# EAGLE board MINI_SAM_D51_004 (EAGLE 9.1.1)
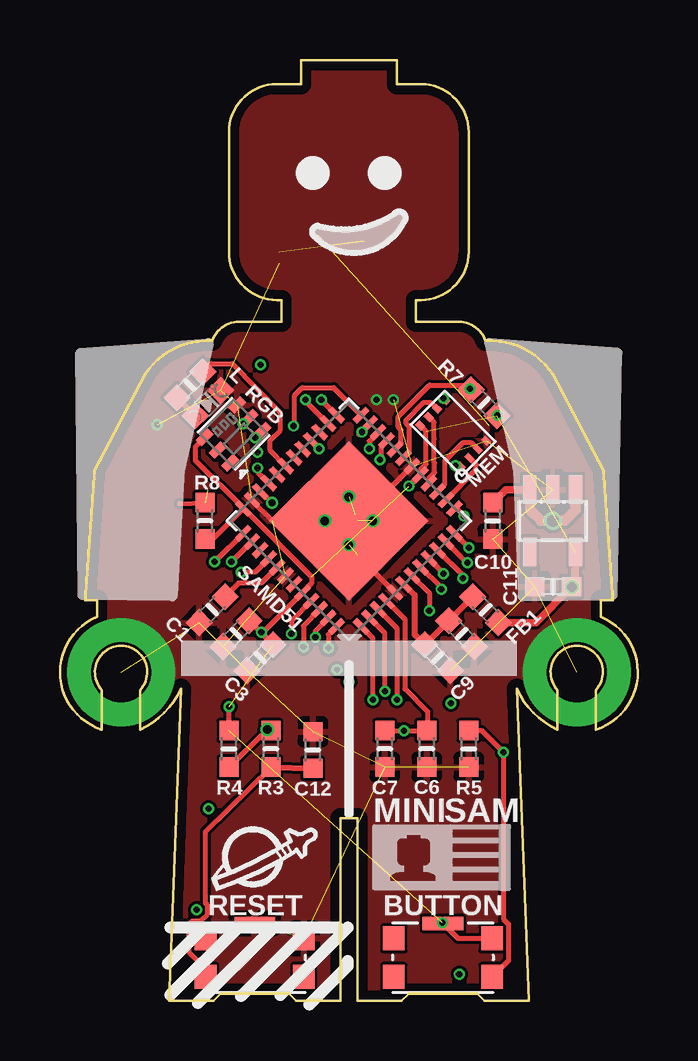
[diagram p0: board, top side]
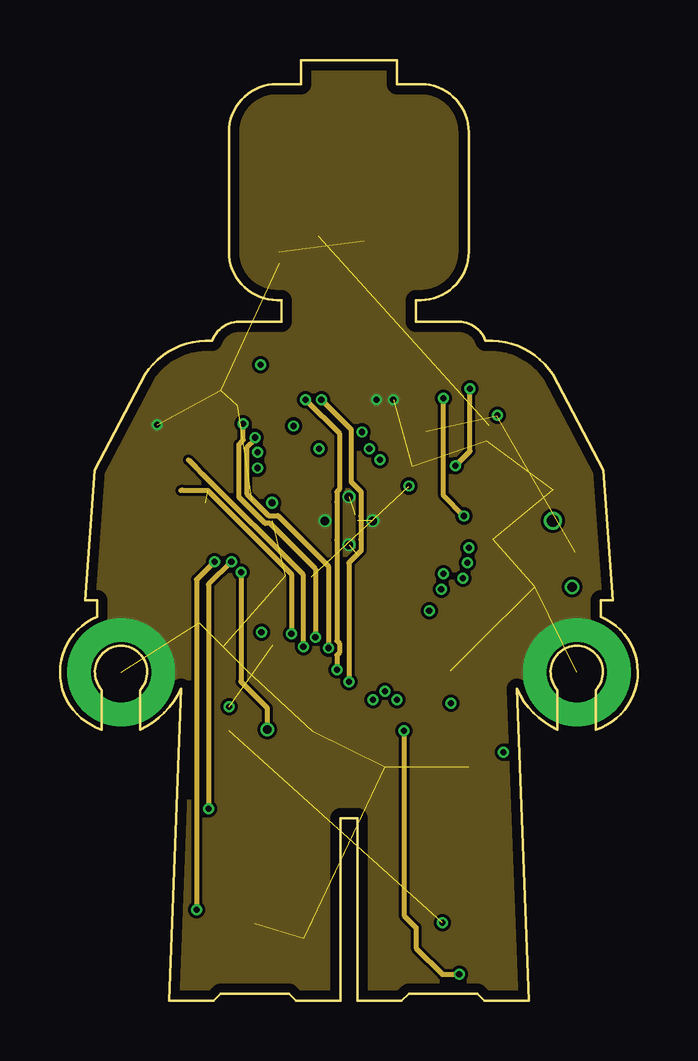
[diagram p1: board, inner layer Route2]
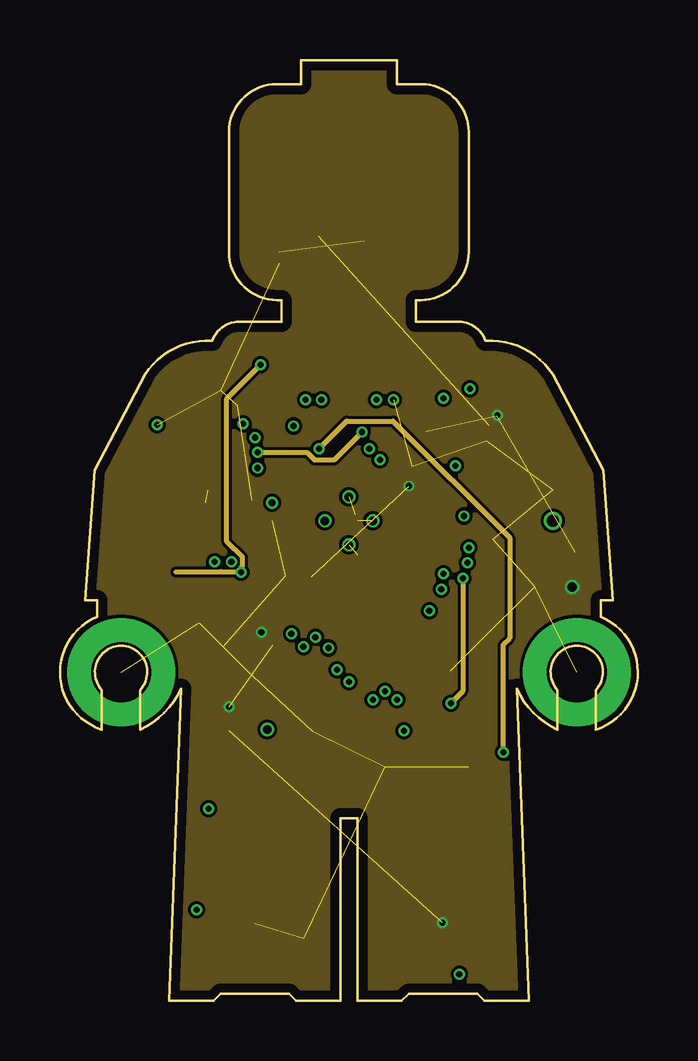
[diagram p2: board, inner layer Route15]
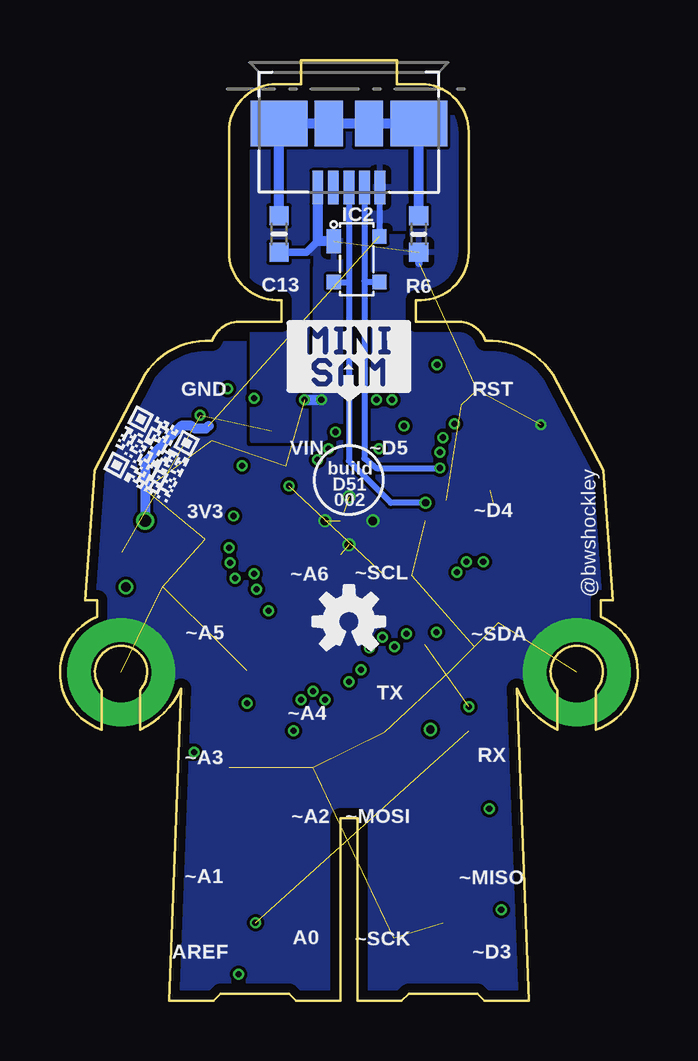
[diagram p3: board, bottom side, seen from below]

Size 24.1 x 39.2 mm. Coordinates in mm from the lower left corner, seen from the top.
Outline: 10.05,39.2 14.05,39.2 14.05,38.2 15.05,38.2 arc-90 17.05,36.2 17.05,31.2 arc-90 15.05,29.2 14.85,29.2 14.85,28.3 16.73,28.3 arc-63 17.75,27.5 arc-60 20.55,26.1 22.65,22.1 23.05,16.7 22.55,16.7 22.55,16 arc-140 22.35,11.3 22.35,12.95 arc132 21.55,14.8 arc132 20.75,12.95 20.75,11.3 arc-40 19.05,13 19.55,0 17.7,0 17.4,0.3 14.55,0.3 14.25,0 12.4,0 12.4,7.6 11.7,7.6 11.7,0 9.85,0 9.55,0.3 6.7,0.3 6.4,0 4.55,0 5.05,13 arc-40 3.35,11.3 3.35,12.95 arc132 2.55,14.8 arc132 1.75,12.95 1.75,11.3 arc-140 1.55,16 1.55,16.7 1.05,16.7 1.45,22.1 3.55,26.1 arc-60 6.35,27.5 arc-63 7.37,28.3 9.25,28.3 9.25,29.2 9.05,29.2 arc-90 7.05,31.2 7.05,36.2 arc-90 9.05,38.2 10.05,38.2 10.05,39.2
Copper layers (1*2*15*16): Top 0.035559375mm / dielectric 0.17018125mm / Route2 0.01778125mm / dielectric 47mil / Route15 0.01778125mm / dielectric 0.17018125mm / Bottom 0.035559375mm
Design rules "oshpark-4layer *": minimum track width 5mil, minimum drill 10mil, track to track 5mil, track to pad 5mil, pad to pad 5mil, via to via 5mil, smd to smd 5mil, copper to edge 15mil, drill to drill 6mil, minimum pad ring 4mil, minimum via ring 4mil, stop-mask expansion 2.5mil, vias tented up to drill 0.5mm, thermal gap 10mil

## Footprints (pad centres in the part's own frame; a part is rotated, then mirrored left to right if it is on the bottom)
_0603MP = smd 0.8 x 0.8: 1 -0.762,0; 2 0.762,0
SOT23-5 = smd 0.55 x 1.2: 1 -0.95,-1.3; 2 0,-1.3; 3 0.95,-1.3; 4 0.95,1.3; 5 -0.95,1.3
SOT143B_REFLOW = smd 1 x 0.6: P1 -0.75,-0.95 | smd 0.6 x 0.6: P2 0.95,-0.95; P$3 0.95,0.95; P$4 -0.95,0.95
TQFN48_7MM = smd 0.25 x 0.75: 1 -2.75,-3.475; 2 -2.25,-3.475; 3 -1.75,-3.475; 4 -1.25,-3.475; 5 -0.75,-3.475; 6 -0.25,-3.475; 7 0.25,-3.475; 8 0.75,-3.475; 9 1.25,-3.475; 10 1.75,-3.475; 11 2.25,-3.475; 12 2.75,-3.475; 25 2.75,3.475; 26 2.25,3.475; 27 1.75,3.475; 28 1.25,3.475; 29 0.75,3.475; 30 0.25,3.475; 31 -0.25,3.475; 32 -0.75,3.475; 33 -1.25,3.475; 34 -1.75,3.475; 35 -2.25,3.475; 36 -2.75,3.475 | smd 0.75 x 0.25: 13 3.475,-2.75; 14 3.475,-2.25; 15 3.475,-1.75; 16 3.475,-1.25; 17 3.475,-0.75; 18 3.475,-0.25; 19 3.475,0.25; 20 3.475,0.75; 21 3.475,1.25; 22 3.475,1.75; 23 3.475,2.25; 24 3.475,2.75; 37 -3.475,2.75; 38 -3.475,2.25; 39 -3.475,1.75; 40 -3.475,1.25; 41 -3.475,0.75; 42 -3.475,0.25; 43 -3.475,-0.25; 44 -3.475,-0.75; 45 -3.475,-1.25; 46 -3.475,-1.75; 47 -3.475,-2.25; 48 -3.475,-2.75 | smd 4.7 x 4.7: THERMAL 0,0
MOLEX_47346-1001 = smd 0.45 x 1.38: P1 1.3,-2.66; P2 0.65,-2.66; P3 0,-2.66; P4 -0.65,-2.66; P5 -1.3,-2.66 | smd 2.375 x 1.9: PAD1 -2.913,0; PAD4 2.913,0 | smd 1.175 x 1.9: PAD2 -0.838,0; PAD3 0.838,0
CHIPLED_0603_NOOUTLINE = smd 0.8 x 0.8: A 0,-0.75; C 0,0.75
APA102_2020 = smd 0.7 x 0.35: 1 -0.95,-0.75; 2 -0.95,0; 3 -0.95,0.75; 4 0.95,0.75; 5 0.95,0; 6 0.95,-0.75
KMS_SWITCH = smd 0.9 x 1: 1 -2.05,-0.8; 2 -2.05,0.8; 4 2.05,0.8; 5 2.05,-0.8 | smd 1.7 x 0.55: 3 0,1.425
USON8 = smd 0.35 x 0.25: 1 -1.2,0.75; 2 -1.2,0.25; 3 -1.2,-0.25; 4 -1.2,-0.75; 5 1.2,-0.75; 6 1.2,-0.25; 7 1.2,0.25; 8 1.2,0.75

## Placement (x,y rotation side)
C1  0.1µF  [_0603MP]  6.35,16.3 225 top
C2  10µF  [_0603MP]  7.35,15.3 225 top
C3  0.1µF  [_0603MP]  8.35,14.3 225 top
C6  4.7µF  [_0603MP]  15.3,10.5 270 top
C7  0.1µF  [_0603MP]  13.55,10.5 270 top
C8  0.1µF  [_0603MP]  16.75,15.3 315 top
C9  10µF  [_0603MP]  15.75,14.3 315 top
C10  10µF  [_0603MP]  18.05,20 90 top
C11  10µF  [_0603MP]  20.57,17.25 180 top
C12  0.1µF  [_0603MP]  10.55,10.45 270 top
C13  4.7nF  [_0603MP]  14.96,31.95 270 bottom
FB1  [_0603MP]  17.75,16.3 135 top
IC1  AP2112K-3.3V  [SOT23-5]  20.55,20 180 top
IC2  PRTR5V0U2X  [SOT143B_REFLOW]  11.72,30.9 270 bottom
IC4  ATSAMD51G_TQFN48  [TQFN48_7MM]  12.05,20 45 top
J1  MOLEX_47346-100147346  [MOLEX_47346-1001]  12.05,36.55 0 bottom
L  [CHIPLED_0603_NOOUTLINE]  6.17,24.9 315 top
R2  1k  [_0603MP]  5.42,25.66 45 top
R3  330Ohm  [_0603MP]  8.8,10.5 270 top
R4  10K  [_0603MP]  7.05,10.5 90 top
R5  10K  [_0603MP]  17.05,10.5 90 top
R6  1M  [_0603MP]  9.14,31.95 90 bottom
R7  100k  [_0603MP]  17.68,24.91 135 top
R8  1k  [_0603MP]  6.05,20 270 top
RGB  AP102-2020  [APA102_2020]  7.24,23.62 45 top
SW1  KMS233GLFG  [KMS_SWITCH]  8.12,1.8 0 top
SW2  KMS233GLFG  [KMS_SWITCH]  15.97,1.8 0 top
U1  GD25x16  [USON8]  16.4,23.65 135 top
U$1  [MINISAMQR_3MM]  22.3,22.15 332.3 bottom
U$3  [OSHW-LOGO-S]  12.05,15.8 0 bottom

## Library data of the parts
C1-C3 C6-C13 FB1 IC4 L R2-R8 RGB U1 = microbuilder
IC1 = SparkFun-PowerIC; PROD_ID: VREG-12457
IC2 J1 SW1 SW2 U$1 = Shockley_Custom
U$3 = SparkFun-Aesthetics

## Nets
!RESET: IC4.40 R3.1 R4.1
A0: IC4.3
A1: IC4.10
A2: IC4.7
A3: IC4.8
A4: IC4.9
A5: IC4.11
A6_D2: IC4.12
AREF: C6.1 C7.1 IC4.4
D3: IC4.37
D4: IC4.23
D5: IC4.24
D9: IC4.28 R5.2 SW2.5
D10: IC4.29
D11: IC4.30
D12: IC4.32
D13: IC4.31 R2.2
DOTSTAR_CLK: IC4.47 RGB.5
DOTSTAR_DATA: IC4.48 RGB.6
GND: C1.2 C2.2 C3.2 C6.2 C7.2 C8.2 C9.2 C10.1 C11.2 C12.1 C13.2 IC1.2 IC2.P1 IC4.5 IC4.18 IC4.35 IC4.42 IC4.THERMAL J1.P5 L.C R5.1 R6.1 RGB.4 SW1.3 SW1.4 U1.4
MISO: IC4.38
MOSI: IC4.1
N$2: C13.1 J1.PAD1 J1.PAD2 J1.PAD3 J1.PAD4 R6.2
N$3: L.A R2.1
N$4: C12.2 R3.2 SW1.1
N$9: C1.1 IC4.41
QSPI_CS: IC4.20 R7.2 U1.1
QSPI_DATA[0]: IC4.13 U1.5
QSPI_DATA[1]: IC4.14 U1.2
QSPI_DATA[2]: IC4.15 U1.3
QSPI_DATA[3]: IC4.16 U1.7
QSPI_SCK: IC4.19 U1.6
RX_D0: IC4.25
SCK: IC4.2
SCL: IC4.22
SDA: IC4.21
SWCLK: IC4.45 R8.1
SWDIO: IC4.46
TX_D1: IC4.26
USBD+ [USB_DATA]: IC2.P2 IC4.34 J1.P3
USBD- [USB_DATA]: IC2.P$3 IC4.33 J1.P2
VDD: C2.1 C3.1 C11.1 FB1.1 IC1.5 IC4.17 IC4.36 IC4.44 R4.2 R7.1 R8.2 RGB.3 SW2.3 SW2.4 U1.8
VDDANA: C8.1 C9.1 FB1.2 IC4.6
VIN: C10.2 IC1.1 IC1.3 IC2.P$4 J1.P1
VSW: IC4.43

## Tracks (layer width: path | path; a pad name or v marks a point on that pad's centre or on a via)
!RESET  (via drill 0.25, 0.35)
  Top 0.203: v8.65,11.3 R3.1 8.6,11.26 R4.1 | IC4.40 8.14,17.86 v7.55,17.86
  Route2 0.203: v7.55,17.86 7.55,13.3 8.65,12.2 v8.65,11.3
  Route15 0.203: v8.37,26.5 6.96,25.09 6.96,19.14 7.6,18.49 7.6,18.11 7.55,18.05 v7.55,17.86 6.7,17.86 | 6.7,17.86 4.83,17.86 | 6.72,17.88 6.7,17.86
A0  (via drill 0.25)
  Top 0.203: IC4.3 14.05,15.53 v14.05,12.55
A1  (via drill 0.25)
  Top 0.203: v16.8,17.6 16.8,17.73 IC4.10
  Route15 0.203: v16.8,17.6 16.8,12.9 v16.3,12.4
A2  (via drill 0.25)
  Top 0.203: IC4.7 15.4,17 v15.4,16.25
A3  (via drill 0.25)
  Top 0.203: v15.9,17.15 15.9,17.21 IC4.8
A4  (via drill 0.25)
  Top 0.203: v16,17.8 16,17.82 IC4.9
A5  (via drill 0.25)
  Top 0.203: IC4.11 16.68,18.55 v17,18.25
A6_D2  (via drill 0.25)
  Top 0.203: v17.05,18.88 IC4.12
AREF  (via drill 0.25)
  Top 0.203: C7.1 14.35,11.26 | 14.35,11.26 C6.1 15.33,12.05 14.38,13 14.38,15.9 IC4.4 | v14.35,11.25 14.35,11.26
  Route2 0.203: v14.35,11.25 14.35,3.55 14.85,3.05 14.85,2.2 15.95,1.1 v16.65,1.1
D3  (via drill 0.25)
  Top 0.203: IC4.37 v6.45,18.3
  Route2 0.203: v6.45,18.3 5.7,17.55 v5.7,3.8
D4  (via drill 0.25)
  Top 0.203: IC4.23 12.47,23.6 v12.6,23.7
  Route15 0.203: v8.25,22.85 10.3,22.85 10.61,22.54 11.44,22.54 v12.6,23.7
D5  (via drill 0.25)
  Top 0.203: IC4.24 11.41,25.55 10.1,25.55 9.79,25.24 9.79,23.99 v9.75,23.95
D9  (via drill 0.25)
  Top 0.203: SW2.5 18.7,1.68 18.7,3.19 18.5,3.4 v18.5,10.35 17.59,11.26 R5.2 | IC4.28 10.5,23.32 v10.8,23
  Top 0.254: 18.02,1.29 SW2.5
  Route15 0.203: v18.5,10.35 18.5,14.85 18.75,15.11 18.75,19.29 13.89,24.16 11.95,24.16 v10.8,23
D13
  Top 0.203: IC4.31 8.76,22.93 8.76,23.35 9.19,23.78 9.19,24.51 7.2,26.55 6.3,26.55 R2.2
DOTSTAR_CLK  (via drill 0.25)
  Top 0.203: IC4.47 10.65,15.42 v10.65,15.15 | v7.64,24.05 7.91,24.32 RGB.5
  Route2 0.203: v10.65,15.15 10.65,18 8.76,19.89 8.56,19.89 7.46,20.99 7.46,23.18 7.64,23.36 v7.64,24.05
DOTSTAR_DATA  (via drill 0.25)
  Top 0.203: IC4.48 11.2,15.26 v11.2,14.7 | v8.13,23.47 8.47,23.76 RGB.6
  Route2 0.203: v11.2,14.7 11.2,18.11 9.09,20.22 8.7,20.22 7.79,21.13 7.79,23.04 8.13,23.38 v8.13,23.47
GND  (via drill 0.25, 0.35, 2.5 pad 4.5)  (27 unrouted)
  Top 0.203: 12.3,20.25 IC4.THERMAL | 11.69,20 IC4.THERMAL | IC4.5 12.4,18.59 12.4,20 | IC4.35 8.87,20 IC4.THERMAL | IC4.18 12.4,20 | 12.4,20 IC4.THERMAL | IC4.THERMAL v11.05,20
  Bottom 0.305: 9.14,30.73 R6.1 | C13.2 13.81,31.18 13.35,31.65
  Bottom 0.406: J1.P5 13.35,31.65 IC2.P1 | v13.9,25.05 v13.2,25.05
  other vias: 2.55,13.7 21.55,13.7 13.05,20 4.05,24 12.05,19 12.05,21
  pour Top: 4.55,0 19.55,0 19.55,12 21.05,12 21.05,14 22.05,14 22.05,12 24.05,12 24.05,40 0.05,40 0.05,12 2.05,12 2.05,14 3.05,14 3.05,12 4.55,12
  pour Route2: 4.55,0 19.55,0 19.55,12 21.05,12 21.05,14 22.05,14 22.05,12 24.05,12 24.05,40 0.05,40 0.05,12 2.05,12 2.05,14 3.05,14 3.05,12 4.55,12
  pour Bottom (rank 2): 9.75,40 9.75,32 13.55,32 13.55,27.35 24.05,27.35 24.05,12 19.55,12 19.55,0 4.55,0 4.55,12 3.05,12 3.05,14 2.05,14 2.05,12 0.05,12 0.05,40
MISO  (via drill 0.25)
  Top 0.203: IC4.38 v7.15,18.3
  Route2 0.203: v7.15,18.3 6.2,17.35 v6.2,8
MOSI  (via drill 0.25)
  Top 0.203: v13.05,12.55 13.05,15.11 IC4.1
N$2
  Bottom 0.406: R6.2 J1.PAD4 J1.PAD3 J1.PAD2 J1.PAD1 C13.1
N$3
  Top 0.203: R2.1 5.63,24.37 L.A
N$4
  Top 0.203: 6.07,1.29 SW1.1 6.07,1.33 5.39,2 5.39,3.19 5.53,3.33 5.87,3.33 6.15,3.61 6.15,3.99 6.07,4.07 6.07,7.06 R3.2
  Top 0.254: 6.07,1.07 SW1.1 | R3.2 C12.2
N$9
  Top 0.203: IC4.41 8.39,17.4 7.45,17.4 C1.1
QSPI_CS  (via drill 0.25)
  Top 0.203: IC4.20 14.23,23.24 14.23,23.79 14.1,23.92 14.1,24.34 15.41,25.65 16.95,25.65 R7.2 | U1.1 16.53,22.27 v16.5,22.3 | R7.2 | R7.2 v17.1,25.5
  Route2 0.203: v16.5,22.3 17.1,22.9 v17.1,25.5
QSPI_DATA[0]  (via drill 0.25)
  Top 0.203: IC4.13 16.53,20.51 v16.85,20.2 | U1.5 16.08,25.02 v16,25.1
  Route2 0.203: v16.85,20.2 15.99,21.06 v15.99,25.09 v16,25.1
QSPI_DATA[1]
  Top 0.203: U1.2 17.35,22.35 17.35,22.12 IC4.14
QSPI_DATA[2]
  Top 0.203: 15.97,21.45 IC4.15 16.04,21.52 16.04,22 16.04,22.49 16.8,23.25 17.15,23.25 U1.3
QSPI_DATA[3]
  Top 0.203: IC4.16 15.39,21.78 15.62,22.01 15.62,22.4 15.59,22.43 15.59,23 15.59,23.4 15.59,24.1 U1.7
QSPI_SCK
  Top 0.203: IC4.19 14.56,22.86 14.56,23.93 14.43,24.06 14.43,24.2 15.14,24.91 15.49,24.91 U1.6
RX_D0  (via drill 0.25)
  Top 0.203: IC4.25 v10.89,25.05 v10.9,25.05
  Route2 0.203: v10.89,25.05 v10.9,25.05 12.14,23.81 12.14,21.62 12.55,21.21 12.55,20.22 12.54,20.21 12.54,19.22 12.55,19.21 12.55,18.75 12.05,18.25 v12.05,13.3
SCK  (via drill 0.25)
  Top 0.203: v13.55,12.9 13.55,15.32 IC4.2
SCL  (via drill 0.25)
  Top 0.203: IC4.22 12.9,23.32 v12.9,23
SDA  (via drill 0.25)
  Top 0.203: v13.35,22.55 13.45,22.66 13.39,22.72 13.39,23.11 IC4.21
SWCLK  (via drill 0.25)  (1 unrouted)
  Top 0.203: IC4.45 9.65,15.83 v9.65,15.3 | 4.98,20.72 R8.1
  Route2 0.203: 5.05,21.27 5.14,21.27 6.16,21.27 9.65,17.78 v9.65,15.3
SWDIO  (via drill 0.25)
  Top 0.203: IC4.46 10.15,15.62 v10.15,14.75
  Route2 0.203: v10.15,14.75 10.15,17.75 5.97,21.93 5.65,22.25 5.36,22.54
TX_D1  (via drill 0.25)
  Top 0.203: v10.25,25.05 10.25,24.98 IC4.26
  Route2 0.203: v11.55,13.8 11.55,14.4 11.65,14.51 11.65,14.89 11.54,15 11.54,19.21 11.55,19.22 11.55,20.78 11.54,20.79 11.54,21.21 11.65,21.32 11.65,23.64 v10.25,25.05
USBD+  (via drill 0.3)
  Top 0.203: v8.85,20.75 8.5,21.07 IC4.34
  Bottom 0.254: v8.85,20.75 10.3,20.75 12.05,22.5 12.05,30 | J1.P3 12.05,30 | IC2.P2 12.1,29.95 12.05,30
USBD-  (via drill 0.25)
  Top 0.203: v8.25,22.2 8.25,22.03 IC4.33
  Bottom 0.254: J1.P2 11.4,30 | v8.25,22.2 10.9,22.2 11.4,22.6 11.4,30 | IC2.P$3 11.35,29.95 11.4,30
VDD  (via drill 0.25, 0.4)  (5 unrouted)
  Top 0.203: IC4.36 10.5,17.66 10.5,17.4 10.12,17.02 IC4.44 8.46,15.35 v8.4,15.35 | IC4.36 5.65,22.51 5.65,23.09 RGB.3 | R8.2 6.33,19.19 IC4.36 | R7.1 v18.25,24.4 | IC4.17 15.04,22.13 15.26,22.36 15.26,23.72 U1.8 | SW2.4 16.6,2.6 SW2.3 v15.95,3.25 | R4.2 v7.05,12.25 | C11.1 v21.35,17.25
  Top 0.254: IC4.17 v14.56,21.45 v14.55,21.45 | C2.1 8.38,15.35 v8.4,15.35 8.4,15.33 C3.1
  Top 0.305: 21.55,18.65 IC1.5 21.5,17.4 v21.35,17.25 | FB1.1 19.84,15.76 C11.1
  Bottom 0.305: 21.45,17.35 v21.35,17.25
  pour Route15: 4.55,0 19.55,0 19.55,12 21.05,12 21.05,14 22.05,14 22.05,12 24.05,12 24.05,40 0.05,40 0.05,12 2.05,12 2.05,14 3.05,14 3.05,12 4.55,12
VDDANA
  Top 0.254: C9.1 C8.1 FB1.2 | C9.1 14.95,15.1 | C9.1 14.8,15.25 14.8,16.9 14.79,16.9 IC4.6
VIN  (via drill 0.5)  (1 unrouted)
  Top 0.305: C10.2 18.59,21.3 IC1.3
  Top 0.406: IC1.3 19.6,20.45 20.05,20 v20.55,20 21.05,20 21.5,20.45 IC1.1
  Bottom 0.254: J1.P1 10.77,33.87 IC2.P$4
  Bottom 0.406: 17.9,23.96 18.02,23.84 18.48,23.84 18.6,23.96 19.04,23.96 20.55,22.45 v20.55,20
  pour Bottom: 9.75,40 9.7,32.2 13.8,32.2 13.85,23.35 16.05,23.35 16.05,40

## Text on the board
tNames: MEM | SAMD51 | MINI | SAM | RESET | BUTTON
bNames: RST | GND | ~D5 | VIN | @bwshockley | build / D51 / 002 | ~D4 | 3V3 | ~SCL | ~A6 | ~SDA | ~A5 | TX | ~A4 | RX | ~A3 | ~MOSI | ~A2 | ~MISO | ~A1 | ~D3 | ~SCK | A0 | AREF
tStop: R2
_tNames: L | L | RGB | RGB | IC1 | IC1 | C1 | C1 | FB1 | FB1 | C10 | C11 | C2 | C2 | C3 | C3 | C8 | C8 | C9 | C9 | C6 | C6 | R5 | R5 | C7 | C7 | R3 | R3 | R4 | R4 | C12 | C12
_bNames: IC2 | IC2 | R6 | R6 | C13 | C13 | JP1 | JP1